# Altium PCB SW-SMD_8P-L6.7-W5.4-P1.27-LS8.4.pcbdoc
Units mil, origin at the board's own origin, x right, y up, seen from the top; angles counter-clockwise.
Board outline 765.75 x 860 mil, 2 copper layers (Top Layer, Bottom Layer); 1 components, 0 nets, 8 pads, 0 vias.
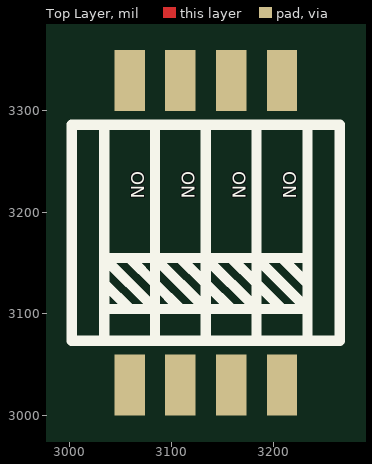
[diagram p0: Top Layer view]
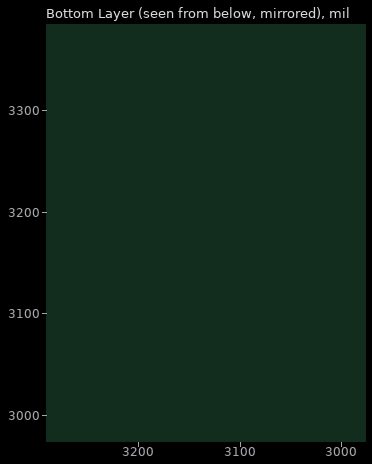
[diagram p1: Bottom Layer view, seen from below]

## Layer stack, top to bottom
Top Layer: signal copper (thickness not stored)
Dielectric: dielectric 12.6, FR-4, Dk 4.8
Bottom Layer: signal copper (thickness not stored)

## Board outline
3515.75,2750 2750,2750 2750,3610 3515.75,3610

## Components (designator, comment, footprint, x,y, rotation, side; value= is the part's Value field where it differs from the comment)
? "SW-SMD_8P-L6.7-W5.4-P1.27-LS8.4" SW-SMD_8P-L6.7-W5.4-P1.27-LS8.4 3133.85,3180 r0 top

## Footprints (in the part's own frame and the unit in brackets; to place one, negate y for a bottom-side part, rotate by r counter-clockwise, add the part's x,y. Pads: shape width x height; smd on the part's side, far side on the other; paste and mask are expansions set on the pad)
SW-SMD_8P-L6.7-W5.4-P1.27-LS8.4 [mil]
  rect 30x60 smd paste+0 mask+2: 1(-75,-150) 2(-25,-150) 3(25,-150) 4(75,-150) 5(75,150) 6(25,150) 7(-25,150) 8(-75,150)
  silkscreen extent -132,-106 132,106

## Nets (pads, with @x,y where several pads share a name; then routed paths per layer and width w, separated by ;. In a path a pad name is that pad's centre, name@x,y a point inside that pad or via, vN(x,y) a via of type N, cw(c..) or ccw(c..) an arc to the next point about the centre after c; other vN are vias at no path point)
pads on no net: ?.1 ?.2 ?.3 ?.4 ?.5 ?.6 ?.7 ?.8

## Text inside footprints (layer, text, board x,y; h text height)
?: Top Silkscreen Layer "ON" at 3210.3,3240.54 h12.98 r270; Top Silkscreen Layer "ON" at 3160.3,3240.54 h12.98 r270; Top Silkscreen Layer "ON" at 3110.3,3240.54 h12.98 r270; Top Silkscreen Layer "ON" at 3060.3,3240.54 h12.98 r270